# Altium PCB Shutdown_2019_v1.1.PcbDoc (part 2 of 2)
Units mil, origin at the board's own origin, x right, y up, seen from the top; angles counter-clockwise.
Board outline 4900 x 3600 mil, 2 copper layers (Top, Bottom); 222 components, 139 nets, 683 pads, 335 vias.
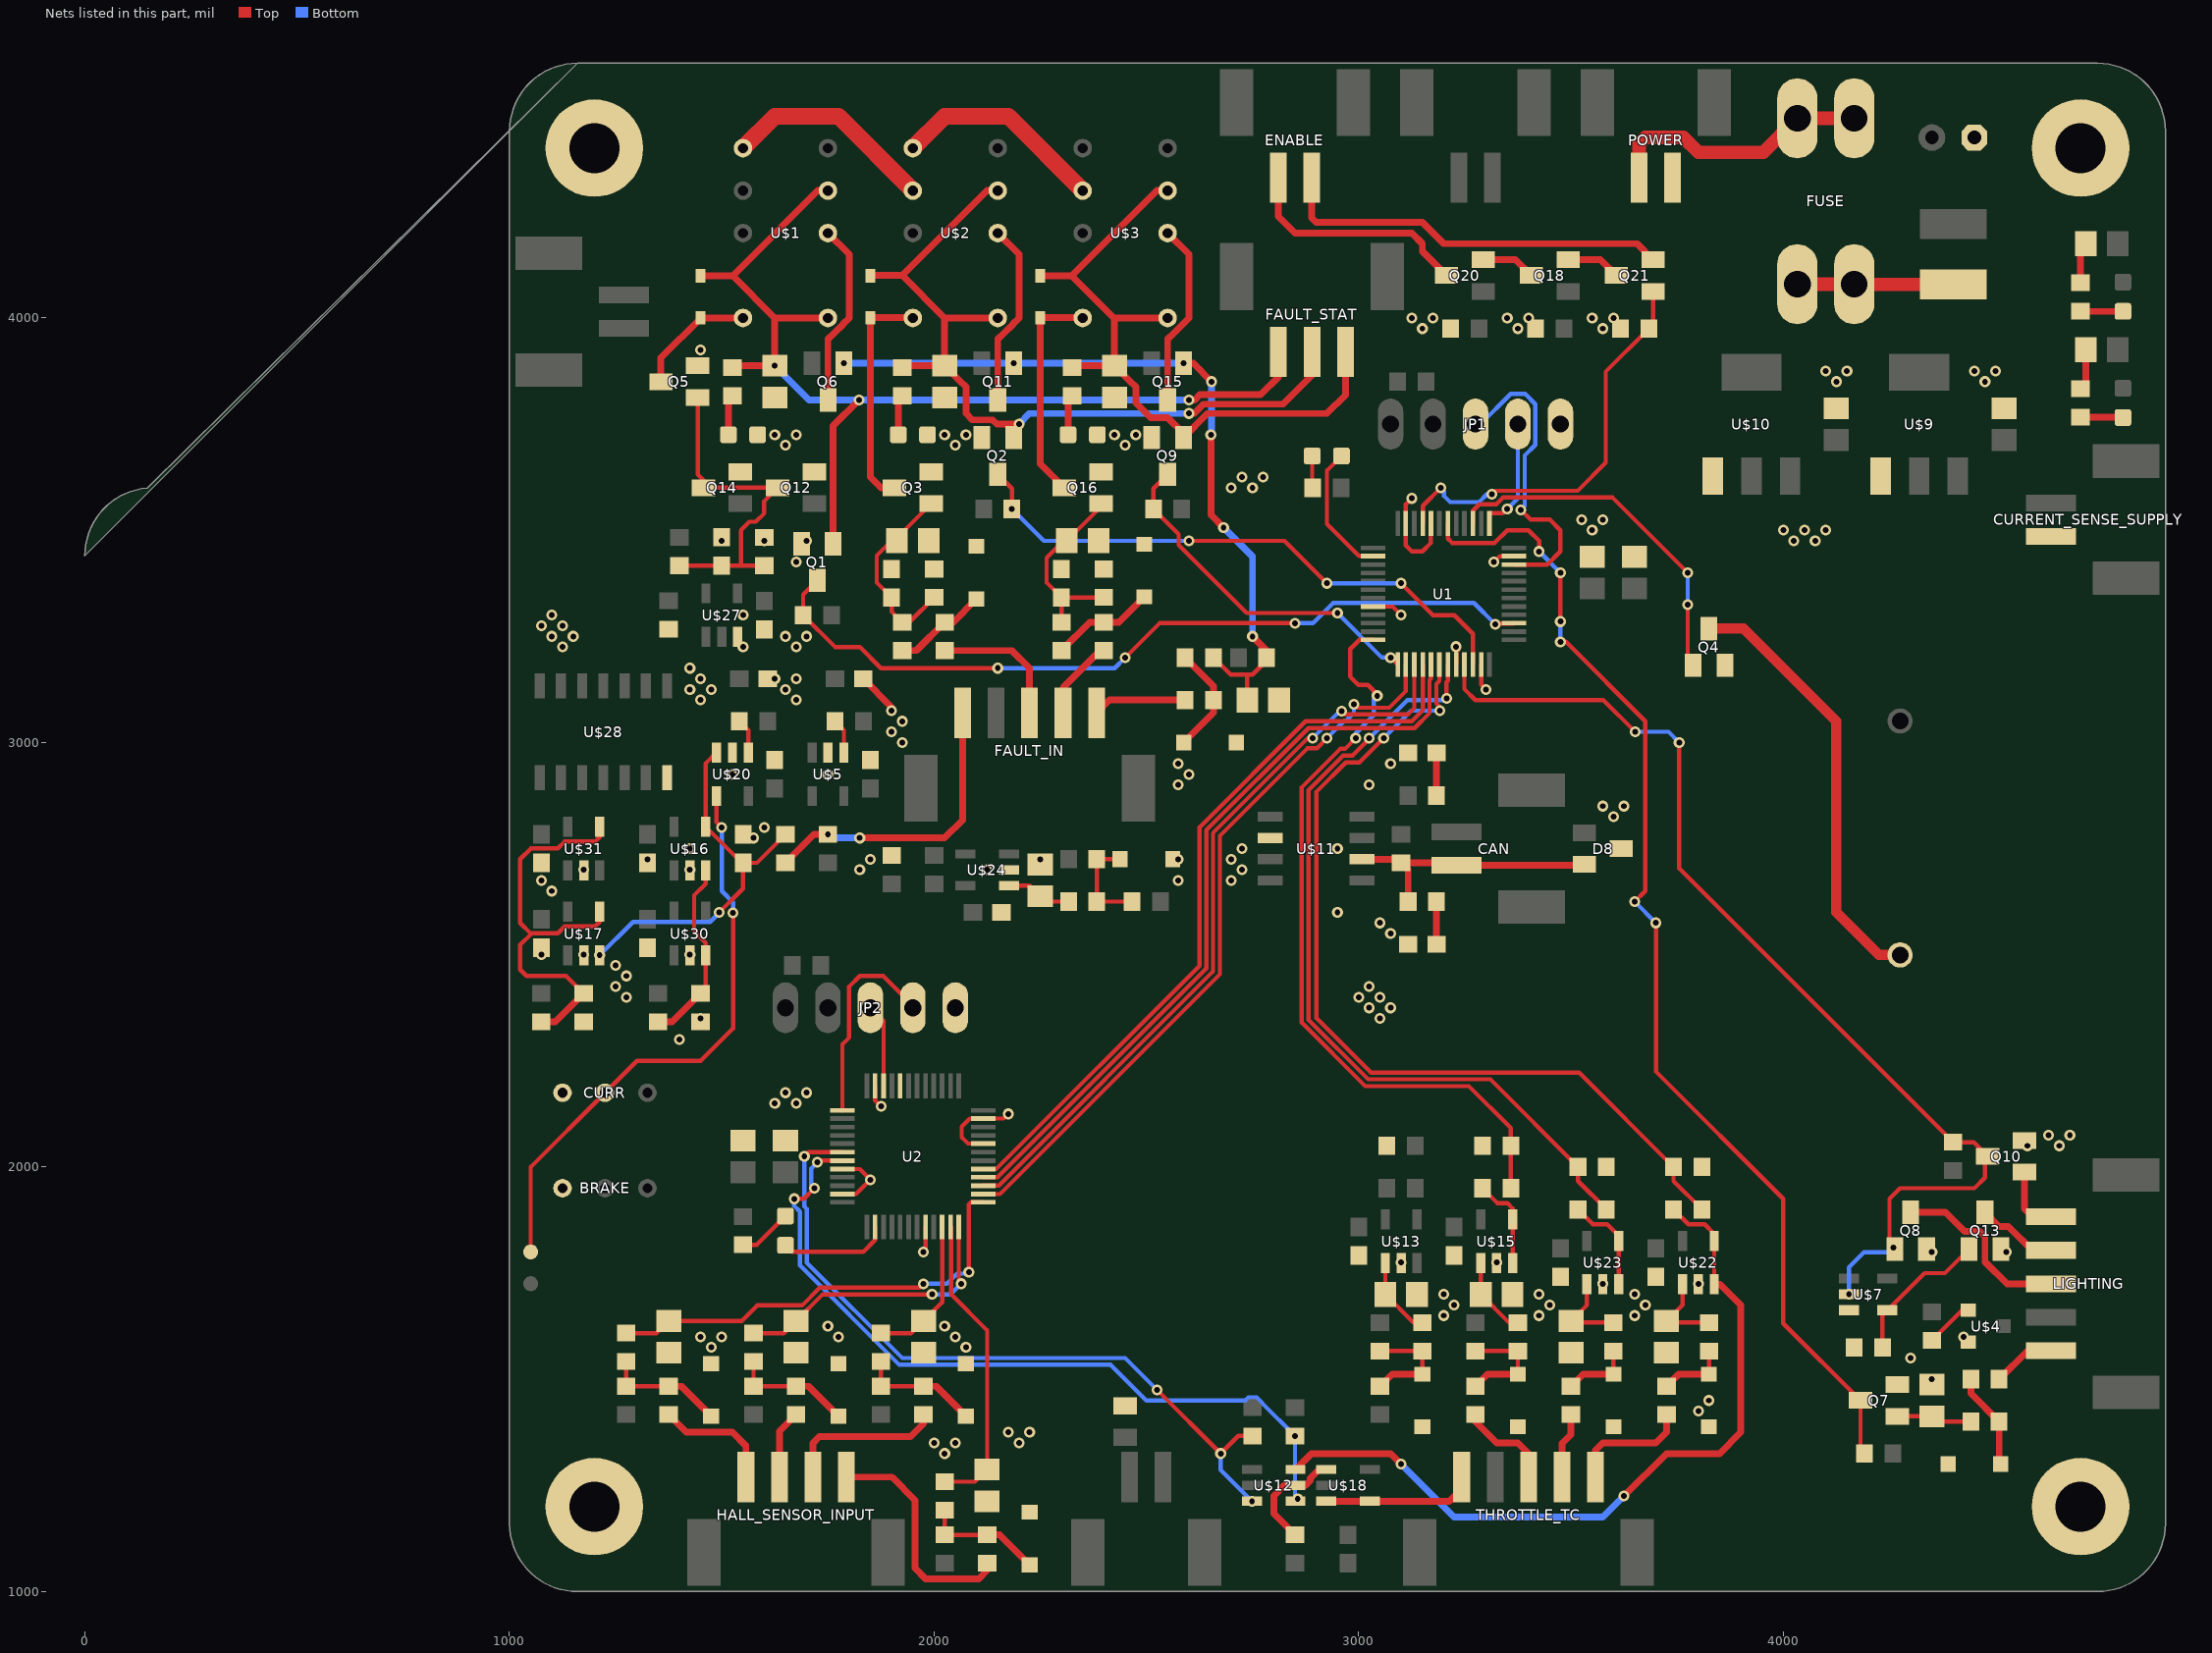
[diagram p2: the nets of this part, all layers, seen from the top]

## Via types
v1: diameter 25.78/25.78 (per signal layer), hole 13.78, Top to Bottom, 335 vias

## Nets (pads, with @x,y where several pads share a name; then routed paths per layer and width w, separated by ;. In a path a pad name is that pad's centre, name@x,y a point inside that pad or via, vN(x,y) a via of type N, cw(c..) or ccw(c..) an arc to the next point about the centre after c; other vN are vias at no path point) (continued)
CANL: CAN.2 D8.2 R19.2 R24.1 U$11.6 | length 628.6
  Top w16: U$11.6@3008.27,2725 3091.54,2725 R24.1@3100,2716.54 ; R19.2@3116.54,2625 3116.54,2700 R24.1@3100,2716.54 ; D8.2@3531.69,2712.6 3529.72,2710.63 CAN.2@3230.31,2710.63 3224.41,2716.54 R24.1@3100,2716.54
CURR_TH: CURR.W TTH1.TP U$20.4 | length 1375.2
  Top w10: TTH1.TP@1050,1800 1050,2000 CURR.W@1225,2175 1300,2250 1450,2250 1526.48,2326.48 v1(1526.48,2598.52) ; U$20.4@1487.6,2873.82 1487.6,2812.4 v1(1500,2800)
  Bottom w10: v1(1500,2800) 1500,2650 1526.48,2623.52 v1(1526.48,2598.52)
CURRENT_SENSE: FAULT_IN.5 R8.1 R44.2 | length 718.5
  Top w16: R44.2@1650,2716.54 1716.93,2783.46 v1(1750,2783.46) ; v1(1825,2775) 2025,2775 2067.52,2817.52 FAULT_IN.5@2067.52,3069.69
  Bottom w16: v1(1750,2783.46) 1758.46,2775 v1(1825,2775)
CURRENT_SENSE_F: C25.1 R44.1 U$16.4 U$17.3 U$20.3 | length 899.6
  Top w10: U$20.3@1487.6,2976.18 1462.4,2950.98 U$16.4@1462.4,2801.18 1547.05,2716.54 C25.1@1550,2716.54 ; v1(1494.18,2600) 1550,2655.82 C25.1@1550,2716.54 ; R44.1@1650,2783.46 1583.07,2716.54 C25.1@1550,2716.54
  Bottom w10: v1(1212.4,2498.82) 1290.87,2577.29 1472.3,2577.29 1486.29,2591.29 1486.29,2592.11 v1(1494.18,2600)
DEBUG: D10.C U1.2 | length 314.8
  Top w10: D10.C@2959.53,3675 2925,3640.47 2925,3515 3001,3439 U1.2@3034,3439
DEBUG_TC: D13.C U2.2 | length 260
  Top w10: D13.C@1650,1815.47 1665.47,1800 1833.06,1800 1861,1827.94 U2.2@1861,1859
ENABLE_IN: ENABLE.2 Q21.2 | length 939.3
  Top w16: ENABLE.2@2889.37,4330.31 2889.37,4235.63 2900,4225 3150,4225 3200,4175 3655.71,4175 Q21.2@3693.31,4137.4
ENABLE_OUT: ENABLE.1 Q20.3 | length 555.5
  Top w16: ENABLE.1@2810.63,4330.31 2810.63,4239.37 2850,4200 3125,4200 3150,4175 3150,4156.69 Q20.3@3206.69,4100
FAULT_BMS: FAULT_IN.3 R37.1 | length 322.5
  Top w16: R37.1@2025,3216.54 2183.46,3216.54 2225,3175 FAULT_IN.3@2225,3069.69
FAULT_BMS_F: C6.1 C23.1 Q3.1 R17.2 R38.2 | length 463.6
  Top w10: Q3.1@1993.31,3562.6 1912.6,3481.89 C23.1@1912.6,3475 1900,3475 1865,3440 1865,3376.54 C6.1@1900,3341.54 1900,3308.46 R38.2@1925,3283.46 1941.93,3283.46 R17.2@2000,3341.54
FAULT_BMS_STAT: C8.1 D9.C FAULT_STAT.2 Q2.1 R22.1 U$2.$P1 U$2.$P4 | length 1970.5
  Top w16: D9.C@1850,4099.21 1850.79,4100 1925,4100 ; R22.1@1925,3883.46 1928.94,3887.4 C8.1@2025,3887.4 ; U$2.$P1@2150,4000 2025,4000 ; U$2.$P4@2150,4300 2125,4300 1925,4100 ; Q2.1@2187.4,3718.31 2187.4,3737.4 v1(2200,3750) 2147.95,3750 2138.08,3759.87 2090.13,3759.87 2075,3775 2075,3837.52 2060.33,3852.19 2060.21,3852.19 C8.1@2025,3887.4 ; v1(2600,3775) 2612.98,3775 2634.98,3797 2822,3797 2900,3875 2890,3885 FAULT_STAT.2@2890,3920.31 ; 1925,4100 2025,4000 ; C8.1@2025,3887.4 2025,4000
  Bottom w16: v1(2200,3750) 2225,3775 v1(2600,3775)
FAULT_BMS_STATUS_3_3: Q2.3 R13.1 U1.22 | length 1374.9
  Top w10: Q2.3@2150,3631.69 2183.46,3598.23 v1(2183.46,3550) ; v1(2600,3475) 2825,3475 v1(2925,3375) ; v1(3100,3375) 3175,3300 3225,3300 3269,3256 U1.22@3269,3184
  Bottom w10: v1(2183.46,3550) 2254.23,3479.23 2258.46,3475 v1(2600,3475) ; v1(2925,3375) v1(3100,3375)
FAULT_BSPD: C7.1 Q5.1 Q12.3 Q14.3 R5.1 R16.2 | length 828.9
  Top w10: R5.1@1400,3416.54 C7.1@1500,3416.54 1545,3416.54 ; Q5.1@1443.31,3812.6 1443.31,3631.69 Q14.3@1475,3600 ; Q14.3@1456.69,3600 Q14.3@1475,3600 ; R16.2@1600,3416.54 1545,3416.54 ; Q14.3@1475,3600 Q12.3@1631.69,3600 1600,3568.31 1600,3540 1580,3520 1565,3520 1545,3500 1545,3416.54
FAULT_BSPD_STAT: C2.1 D2.C FAULT_STAT.1 Q1.1 R15.1 U$1.$P1 U$1.$P4 | length 2527.6
  Top w16: D2.C@1450,4099.21 1525.79,4099.21 ; R15.1@1525,3883.46 1528.94,3887.4 v1(1625,3887.4) 1625,4000 ; U$1.$P1@1750,4000 1625,4000 ; U$1.$P4@1750,4300 1726.57,4300 1525.79,4099.21 ; Q1.1@1762.4,3468.31 1762.4,3746.07 v1(1823.11,3806.78) ; v1(2600,3806.78) 2613.65,3806.78 2625.87,3819 2769,3819 2811.26,3861.26 FAULT_STAT.1@2811.26,3920.31 ; 1525.79,4099.21 1625,4000
  Bottom w16: v1(1625,3887.4) 1705.62,3806.78 v1(1823.11,3806.78) v1(2600,3806.78)
FAULT_BSPD_STATUS_3_3: Q1.3 R12.1 U1.27 | length 1907.7
  Top w10: Q1.3@1725,3381.69 1691.54,3348.23 R12.1@1691.54,3300 1766.54,3225 1825,3225 1875,3175 v1(2150,3175) ; v1(2450,3200) 2531,3281 v1(2850,3281) ; v1(3321.89,3278.11) 3323.79,3280 3365,3280 U1.27@3366,3281
  Bottom w10: v1(2150,3175) 2425,3175 v1(2450,3200) ; v1(2850,3281) 2892.32,3281 2940.1,3328.78 3271.22,3328.78 v1(3321.89,3278.11)
FAULT_IMD: FAULT_IN.2 R41.1 | length 191.7
  Top w16: FAULT_IN.2@2303.74,3069.69 2303.74,3128.74 2391.54,3216.54 R41.1@2400,3216.54
FAULT_IMD_F: C5.1 C26.1 Q16.1 R18.2 R42.2 | length 451.2
  Top w10: R42.2@2300,3283.46 C5.1@2300,3341.54 ; Q16.1@2393.31,3562.6 2393.31,3555.71 C26.1@2312.6,3475 2305,3475 2265,3435 2265,3376.54 C5.1@2300,3341.54 ; R18.2@2400,3341.54 C5.1@2300,3341.54
FAULT_IMD_STAT: C9.1 D15.C FAULT_STAT.3 Q9.1 R21.1 U$3.$P1 U$3.$P4 | length 1649.4
  Top w16: D15.C@2250,4099.21 2324.21,4099.21 ; R21.1@2325,3883.46 2328.94,3887.4 C9.1@2425,3887.4 ; U$3.$P1@2550,4000 2423.43,4000 ; U$3.$P4@2550,4300 2525,4300 2324.21,4099.21 ; FAULT_STAT.3@2968.74,3920.31 2968.74,3818.74 2925,3775 2644.09,3775 Q9.1@2587.4,3718.31 2587.4,3727.73 2550,3765.13 2509.87,3765.13 2475,3800 2475,3837.52 2460.33,3852.19 2460.21,3852.19 C9.1@2425,3887.4 ; 2324.21,4099.21 2423.43,4000 ; 2423.43,4000 2425,3998.43 C9.1@2425,3887.4
FAULT_IMD_STATUS_3_3: Q9.3 R14.1 U1.13 | length 837.4
  Top w10: Q9.3@2550,3631.69 2516.54,3598.23 R14.1@2516.54,3550 2576.11,3490.43 2576.11,3465.1 2736.32,3304.89 v1(2950,3304.89) ; v1(3075,3200) 3076,3200 U1.13@3092,3184
  Bottom w10: v1(2950,3304.89) 3054.89,3200 v1(3075,3200)
FAULT_RESET: FAULT_IN.1 R33.1 | length 221.6
  Top w16: FAULT_IN.1@2382.48,3069.69 2412.8,3100 R33.1@2591.54,3100
FAULT_RESET_F: C22.1 Q6.1 Q11.1 Q15.1 R25.1 R34.2 | length 1812.6
  Top w10: R34.2@2658.46,3200 2698.46,3160 2735,3160 ; C22.1@2737.6,3100 2737.6,3157.4 2735,3160 ; R25.1@2783.46,3200 2783.46,3193.46 2750,3160 2735,3160
  Top w16: v1(2587.4,3893.31) 2610.47,3893.31 v1(2653.78,3850) ; v1(2651.89,3725) 2651.89,3536.14 v1(2681.78,3506.25) ; v1(2750,3250) 2783.46,3216.54 R25.1@2783.46,3200
  Bottom w16: v1(1787.4,3893.31) v1(2187.4,3893.31) v1(2587.4,3893.31) ; v1(2651.89,3725) 2653.78,3726.89 v1(2653.78,3850) ; v1(2681.78,3506.25) 2750,3438.03 v1(2750,3250)
GND: BRAKE.B C1.2 C2.2 C3.2 C4.2 C5.2 C6.2 C7.2 C8.2 C9.2 C10.- C11.2 C12.2 C13.2 C14.2 C15.2 C16.2 C17.2 C18.2 C19.2 C20.2 C22.2 C23.2 C24.2 C25.2 C26.2 C27.2 C28.2 C29.2 C30.2 C31.2 C32.2 C33.2 C34.2 C35.2 C36.2 C37.2 C38.2 C39.2 C40.2 C41.2 C42.2 C43.2 C44.2 C45.2 C46.2 CURR.B CURRENT_SENSE_SUPPLY.2 D1.C D4.C D7.C D8.3 H1.B3,0 H2.B3,0 H3.B3,0 H4.B3,0 JP1.5 JP2.5 POWER.2 Q1.2 Q2.2 Q3.2 Q4.2 Q5.2 Q7.2 Q8.2 Q9.2 Q10.2 Q12.2 Q13.2 Q14.2 Q16.2 R2.1 R3.1 R4.1 R16.1 R17.1 R18.1 R30.1 R31.1 R32.1 R40.1 R43.1 R71.1 R72.1 R73.1 R76.1 R81.1 R83.1 U1.8 U1.20 U1.23 U1.35 U1.44 U1.47 U2.8 U2.20 U2.23 U2.35 U2.44 U2.47 U$4.2 U$5.2 U$7.3 U$8.2 U$9.1 U$10.1 U$11.2 U$13.2 U$14.A U$15.2 U$16.2 U$17.2 U$19.A U$20.2 U$21.A U$22.2 U$23.2 U$24.2 U$25.A U$26.A U$27.3 U$28.P7 U$29.A U$30.2 U$31.2 U$32.A U$33.A U$34.A U$36.A U$37.A U$38.A U$39.A | length 1241.2
  Top w10: U2.47@1784,1936 1816,1936 v1(1850,1970) 1825,1995 U2.44@1784,1995 ; U2.35@1861,2191 1861,2157.11 v1(1875,2143.11) ; v1(1975,1800) 1980,1805 U2.8@1980,1859 ; U2.20@2116,2055 2080,2055 2065,2070 2065,2095 2084,2114 U2.23@2116,2114 2164,2114 v1(2175,2125) ; U1.8@3034,3320 3080,3320 v1(3100,3300) ; v1(3125,3575) 3111,3561 U1.47@3111,3516 3111,3464 3125,3450 3150,3450 3170,3470 U1.44@3170,3516 ; v1(3229.5,3225.71) 3230,3225.21 U1.20@3230,3184 ; U1.23@3289,3184 3289,3136 v1(3300,3125) ; v1(3318.11,3425) 3331.11,3438 3333.25,3438 3334.25,3439 U1.35@3366,3439
  Top w16: C3.2@1833.46,3150 1900,3083.46 v1(1900,3075) ; R2.1@4700,3833.46 4712.6,3846.06 C11.2@4712.6,3925 ; R4.1@4700,4083.46 4700,4162.4 C14.2@4712.6,4175
  other v1: 2025,1325 2000,1350 2050,1350 2200,1350 2175,1375 2225,1375 3800,1425 3825,1450 4350,1500 4300,1550 1475,1575 2075,1575 1450,1600 1500,1600 1775,1600 2050,1600 4425,1600 1750,1625 2025,1625 3200,1650 3425,1650 3650,1650 3225,1675 3450,1675 3675,1675 3200,1700 3425,1700 3650,1700 3575,1725 3800,1725 3100,1775 3325,1775 4350,1800 4525,1800 4575,2050 4650,2050 4625,2075 4675,2075 1625,2150 1675,2150 1650,2175 1700,2175 1400,2300 1450,2350 3050,2350 3025,2375 3075,2375 1275,2400 3000,2400 3050,2400 1250,2425 3025,2425 1275,2450 1250,2475 1075,2500 1175,2500 1425,2500 3075,2550 3050,2575 2950,2600 1100,2650 1075,2675 2575,2675 2700,2675 1175,2700 1425,2700 1825,2700 2125,2700 2725,2700 1325,2725 1850,2725 2250,2725 2575,2725 2700,2725 1425,2750 2725,2750 2950,2750 1575,2775 1600,2800 3600,2825 3575,2850 3625,2850 2575,2900 3025,2900 1525,2925 1750,2925 2600,2925 2575,2950 3075,2950 1925,3000 1900,3025 1925,3050 1450,3100 1675,3100 1425,3125 1475,3125 1650,3125 1450,3150 1625,3150 1675,3150 1425,3175 1125,3225 1550,3225 1675,3225 1100,3250 1150,3250 1650,3250 1700,3250 1075,3275 1125,3275 1100,3300 1550,3300 1675,3425 1500,3475 1600,3475 1700,3475 4025,3475 4075,3475 3550,3500 4000,3500 4050,3500 4100,3500 3525,3525 3575,3525 2700,3600 2750,3600 2725,3625 2775,3625 1650,3700 2050,3700 2450,3700 1625,3725 1675,3725 2025,3725 2075,3725 2425,3725 2475,3725 4125,3850 4475,3850 4100,3875 4150,3875 4450,3875 4500,3875 1450,3925 3150,3975 3375,3975 3575,3975 3125,4000 3175,4000 3350,4000 3400,4000 3550,4000 3600,4000
HALL_FL: HALL_SENSOR_INPUT.1 R57.1 | length 549.7
  Top w16: HALL_SENSOR_INPUT.1@1793.11,1269.69 1900.32,1269.69 1955,1215 1955,1055 1980,1030 2105,1030 2125,1050 R57.1@2125,1066.54
HALL_FL_F: C33.1 R58.2 U2.11 | length 719.2
  Top w10: R58.2@2025,1258.46 2096.06,1258.46 C33.1@2125,1287.4 2125,1615 2040,1700 2040,1858 U2.11@2039,1859
HALL_FR: HALL_SENSOR_INPUT.2 R59.1 | length 380.8
  Top w16: HALL_SENSOR_INPUT.2@1714.37,1269.69 1714.37,1349.37 1730,1365 1945,1365 1975,1395 R59.1@1975,1416.54
HALL_FR_F: C34.1 R60.2 U2.10 | length 351.8
  Top w10: R60.2@1875,1608.46 1946.06,1608.46 C34.1@1975,1637.4 2019,1681.4 U2.10@2019,1859
HALL_RL: HALL_SENSOR_INPUT.3 R61.1 | length 163.2
  Top w16: HALL_SENSOR_INPUT.3@1635.63,1269.69 1635.63,1377.17 R61.1@1675,1416.54
HALL_RL_F: C35.1 R62.2 U2.12 | length 673.6
  Top w10: R62.2@1575,1608.46 1646.06,1608.46 C35.1@1675,1637.4 1737.6,1700 v1(1995.11,1700) ; U2.12@2058,1859 2058,1730.89 v1(2063.89,1725)
  Bottom w10: v1(1995.11,1700) 2038.89,1700 v1(2063.89,1725)
HALL_RR: HALL_SENSOR_INPUT.4 R63.1 | length 285.7
  Top w16: R63.1@1375,1416.54 1416.54,1375 1525,1375 1556.89,1343.11 HALL_SENSOR_INPUT.4@1556.89,1269.69
HALL_RR_F: C36.1 R64.2 U2.13 | length 1062.5
  Top w10: R64.2@1275,1608.46 1346.06,1608.46 C36.1@1375,1637.4 1547.04,1637.4 1583.63,1673.99 1688.96,1673.99 1730.97,1716 1966.17,1716 v1(1975.08,1724.92) ; v1(2081.89,1751.94) 2081.89,1911.89 2087,1917 U2.13@2116,1917
  Bottom w10: v1(1975.08,1724.92) 2030.02,1724.92 2053.99,1748.89 2078.84,1748.89 v1(2081.89,1751.94)
HV_CONNECTED_3_3: Q8.1 Q10.3 R23.1 U1.21 U$7.2 | length 2529.9
  Top w10: U1.21@3249,3184 3249,3126 3275,3100 3576.11,3100 v1(3651.11,3025) ; v1(3754.78,3000) 3754.78,2703.69 R23.1@4400,2058.46 4448.23,2058.46 Q10.3@4481.69,2025 4475,2018.31 4475,1975 4450,1950 4275,1950 4250,1925 4250,1819.29 v1(4259.65,1809.65) Q8.1@4262.6,1806.69
  Bottom w10: v1(3651.11,3025) 3729.78,3025 v1(3754.78,3000) ; v1(4154.72,1700) 4154.72,1763.51 4190.1,1798.89 4248.89,1798.89 v1(4259.65,1809.65)
N$1: D9.A Q3.3 U$2.$P12 | length 543.2
  Top w16: Q3.3@1906.69,3600 1875,3600 1850,3625 D9.A@1850,4000.79 1949.21,4000.79 U$2.$P12@1950,4000
N$2: R55.2 R56.1 U$21.C | length 229.2
  Top w16: R55.2@4441.54,1500 4441.54,1466.93 R56.1@4508.46,1400 4508.46,1303.54 U$21.C@4512.01,1300
N$3: R9.2 U$4.1 | length 115
  Top w10: R9.2@4350,1591.54 4420.87,1662.4 U$4.1@4435.63,1662.4
N$4: Q4.3 U$6.NEG | length 1032.1
  Top w24: Q4.3@3825,3268.31 3906.69,3268.31 4125,3050 4125,2600 4225.59,2499.41 U$6.NEG@4275,2499.41
N$5: R10.2 R45.1 R77.1 U$14.C | length 266.4
  Top w10: R77.1@3050,1566.54 R45.1@3150,1566.54 U$14.C@3150,1512.01
  Top w16: R10.2@3050,1483.46 3078.54,1512.01 U$14.C@3150,1512.01
N$6: FUSE.P$2 FUSE.P$3 L4.P$1 | length 367.2
  Top w32: FUSE.P$3@4033.07,4079.72 FUSE.P$2@4166.93,4079.72 4167.52,4079.13 L4.P$1@4400,4079.13
N$7: C40.1 R45.2 U$13.1 | length 188.8
  Top w10: U$13.1@3062.6,1773.82 C40.1@3062.6,1700 3129.13,1633.46 R45.2@3150,1633.46
N$8: D7.A R15.2 | length 95.5
  Top w16: D7.A@1515.47,3725 1515.47,3807.01 R15.2@1525,3816.54
N$9: Q13.1 R3.2 U$7.4 | length 344.5
  Top w10: R3.2@4233.46,1575 4233.46,1650.79 U$7.4@4245.28,1662.6 4332.68,1750 4380.91,1750 Q13.1@4437.6,1806.69
N$10: D12.C R4.2 | length 100.4
  Top w16: R4.2@4700,4016.54 4701.06,4015.47 D12.C@4800,4015.47
N$11: D11.C R2.2 | length 100.4
  Top w16: R2.2@4700,3766.54 4798.94,3766.54 D11.C@4800,3765.47
N$12: R7.2 U$12.5 U$18.1 | length 265.1
  Top w16: R7.2@2850,1133.46 2800,1183.46 2800,1225 2825,1250 U$12.5@2851.18,1250 2875,1250 2886.2,1261.2 2886.2,1266.63 2906.97,1287.4 U$18.1@2923.82,1287.4
N$13: R36.2 U$20.1 | length 82.5
  Top w10: R36.2@1541.54,3050 1562.4,3029.13 U$20.1@1562.4,2976.18
N$14: C17.1 R19.1 | length 100
  Top w16: C17.1@3183.46,2525 R19.1@3183.46,2625
N$17: C18.1 R20.1 | length 100
  Top w16: R20.1@3183.46,2875 C18.1@3183.46,2975
N$18: R1.2 U$5.1 | length 82.5
  Top w10: R1.2@1766.54,3050 1787.4,3029.13 U$5.1@1787.4,2976.18
N$19: D10.A R27.2 | length 75.4
  Top w10: D10.A@2890.47,3675 2890.47,3601.06 R27.2@2891.54,3600
N$20: R49.2 R50.1 U$32.C | length 166.4
  Top w10: U$32.C@3825,1512.01 R50.1@3825,1566.54
  Top w16: R49.2@3725,1483.46 3753.54,1512.01 U$32.C@3825,1512.01
N$21: D13.A R29.2 | length 128.2
  Top w10: R29.2@1550,1816.54 1582.01,1816.54 D13.A@1650,1884.53
N$22: R78.2 R79.1 R82.1 U$19.C | length 266.4
  Top w10: R82.1@3275,1566.54 R79.1@3375,1566.54 U$19.C@3375,1512.01
  Top w16: R78.2@3275,1483.46 3303.54,1512.01 U$19.C@3375,1512.01
N$23: C41.1 R79.2 U$15.1 | length 188.8
  Top w10: U$15.1@3287.6,1773.82 C41.1@3287.6,1700 3354.13,1633.46 R79.2@3375,1633.46
N$24: Q18.3 Q20.2 | length 128.9
  Top w16: Q20.2@3293.31,4137.4 3369.29,4137.4 Q18.3@3406.69,4100
N$25: Q18.2 Q21.3 | length 128.9
  Top w16: Q18.2@3493.31,4137.4 3569.29,4137.4 Q21.3@3606.69,4100
N$27: U$1.$P8 U$2.$P9 | length 503.6
  Top w40: U$1.$P8@1550,4400 1625,4475 1775,4475 U$2.$P9@1950,4300
N$28: Q6.3 U$1.$P3 | length 435.1
  Top w16: Q6.3@1750,3806.69 1750,3950 1764.19,3964.19 1764.83,3964.19 1785.81,3985.17 1785.81,3985.81 1800,4000 1800,4150 U$1.$P3@1750,4200
N$29: R33.2 R34.1 U$25.C | length 256.9
  Top w16: U$25.C@2587.99,3000 2658.46,3070.47 R33.2@2658.46,3100 2658.46,3133.07 R34.1@2591.54,3200
N$31: U$2.$P8 U$3.$P9 | length 503.6
  Top w40: U$2.$P8@1950,4400 2025,4475 2175,4475 U$3.$P9@2350,4300
N$32: D2.A Q5.3 U$1.$P12 | length 289.3
  Top w16: Q5.3@1356.69,3850 1356.69,3905.91 D2.A@1450.79,4000 ; D2.A@1450,4000.79 D2.A@1450.79,4000 ; U$1.$P12@1550,4000 D2.A@1450.79,4000
N$34: D4.A R22.2 | length 95.5
  Top w16: D4.A@1915.47,3725 1915.47,3807.01 R22.2@1925,3816.54
N$35: Q11.3 U$2.$P3 | length 435.1
  Top w16: Q11.3@2150,3806.69 2150,3950 2164.19,3964.19 2164.83,3964.19 2185.81,3985.17 2185.81,3985.81 2200,4000 2200,4150 U$2.$P3@2150,4200
N$37: R37.2 R38.1 U$26.C | length 225.3
  Top w16: R38.1@1925,3216.54 1958.07,3216.54 R37.2@2025,3283.46 2045.47,3283.46 U$26.C@2100,3337.99
N$38: C29.1 R50.2 U$22.1 | length 203.6
  Top w10: U$22.1@3762.6,1723.82 3762.6,1675 C29.1@3725,1637.4 3728.94,1633.46 R50.2@3825,1633.46
N$42: D1.A R21.2 | length 95.5
  Top w16: D1.A@2315.47,3725 2315.47,3807.01 R21.2@2325,3816.54
N$43: Q15.3 U$3.$P3 | length 435.1
  Top w16: Q15.3@2550,3806.69 2550,3950 2564.19,3964.19 2564.83,3964.19 2600,3999.36 2600,4150 U$3.$P3@2550,4200
N$44: D15.A Q16.3 U$3.$P12 | length 524.6
  Top w16: Q16.3@2306.69,3600 2250,3656.69 D15.A@2250,4000.79 2349.21,4000.79 U$3.$P12@2350,4000
N$49: R41.2 R42.1 U$29.C | length 247.4
  Top w16: R42.1@2300,3216.54 2366.93,3283.46 R41.2@2400,3283.46 2435.47,3283.46 U$29.C@2495,3342.99
N$52: R51.2 R52.1 U$33.C | length 166.4
  Top w10: U$33.C@3600,1512.01 R52.1@3600,1566.54
  Top w16: R51.2@3500,1483.46 3528.54,1512.01 U$33.C@3600,1512.01
N$53: C30.1 R52.2 U$23.1 | length 203.6
  Top w10: U$23.1@3537.6,1723.82 3537.6,1675 C30.1@3500,1637.4 3503.94,1633.46 R52.2@3600,1633.46
N$59: R35.1 R53.2 R54.1 U$34.C | length 237.6
  Top w10: U$34.C@2437.99,2725 R35.1@2383.46,2725 R54.1@2383.46,2625 R53.2@2466.54,2625
N$60: C31.1 R54.2 U$24.1 | length 155.9
  Top w10: U$24.1@2176.18,2662.6 2225,2662.6 C31.1@2250,2637.6 2262.6,2625 R54.2@2316.54,2625
N$65: R57.2 R58.1 R65.1 U$36.C | length 287.3
  Top w10: R58.1@2025,1191.54 R65.1@2025,1133.46 R57.2@2125,1133.46
  Top w16: R57.2@2125,1133.46 2154.53,1133.46 U$36.C@2225,1062.99
N$68: R59.2 R60.1 R66.1 U$37.C | length 287.3
  Top w10: R60.1@1875,1541.54 R66.1@1875,1483.46 R59.2@1975,1483.46
  Top w16: R59.2@1975,1483.46 2004.53,1483.46 U$37.C@2075,1412.99
N$71: R61.2 R62.1 R67.1 U$38.C | length 287.3
  Top w10: R62.1@1575,1541.54 R67.1@1575,1483.46 R61.2@1675,1483.46
  Top w16: R61.2@1675,1483.46 1704.53,1483.46 U$38.C@1775,1412.99
N$74: R63.2 R64.1 R68.1 U$39.C | length 287.3
  Top w10: R64.1@1275,1541.54 R68.1@1275,1483.46 R63.2@1375,1483.46
  Top w16: R63.2@1375,1483.46 1404.53,1483.46 U$39.C@1475,1412.99
OC_TH: R11.1 R43.2 U$17.4 U$31.4 | length 1012.5
  Top w10: R43.2@1175,2408.46 1133.46,2450 1040,2450 1025,2465 1025,2523.43 1050.76,2549.19 ; U$17.4@1212.4,2601.18 1212.4,2577.4 1201.56,2566.56 1129.85,2566.56 1114.1,2550.81 1052.38,2550.81 1050.76,2549.19 ; U$31.4@1212.4,2801.18 1212.4,2777.4 1201.56,2766.56 1129.85,2766.56 1114.1,2750.81 1050.81,2750.81 1025,2725 1025,2574.95 1050.76,2549.19
  Top w16: R11.1@1075,2341.54 1108.07,2341.54 R43.2@1175,2408.46
PA11: U2.32
PRECHARGE_COMP_F: C32.1 Q7.1 R56.2 | length 178.4
  Top w10: Q7.1@4268.31,1412.6 C32.1@4350,1412.6 4362.6,1400 R56.2@4441.54,1400
PRECHARGE_COMPLETE: LIGHTING.5 R55.1 | length 149.8
  Top w16: R55.1@4508.46,1500 4575.98,1567.52 LIGHTING.5@4630.31,1567.52
PRECHARGE_COMPLETE_3_3: Q7.3 R74.1 U1.42 | length 2773.7
  Top w10: U1.42@3210,3516 3210,3480 3220,3470 3320,3470 3350,3500 3400,3500 3425,3475 v1(3425,3450) ; v1(3475,3237.11) 3487.89,3237.11 3675,3050 3675,2650 v1(3650,2625) ; v1(3475,3284.89) v1(3475,3400) ; v1(3700,2575) 3700,2225 4000,1925 4000,1631.69 Q7.3@4181.69,1450 4181.69,1334.84 R74.1@4191.54,1325
  Bottom w10: v1(3425,3450) v1(3475,3400) ; v1(3475,3237.11) v1(3475,3284.89) ; v1(3650,2625) v1(3700,2575)
PWR: FUSE.P$1 FUSE.P$4 POWER.1 | length 640.3
  Top w32: POWER.1@3660.63,4330.31 3660.63,4410.63 3675,4425 3765,4425 3800,4390 3952.8,4390 FUSE.P$4@4033.07,4470.28 FUSE.P$1@4166.93,4470.28
RTD_EN: Q21.1 R32.2 U1.45 | length 999.2
  Top w10: U1.45@3151,3516 3151,3557.67 v1(3193.33,3600) ; v1(3313.94,3585.11) 3321.83,3593 3515.63,3593 3582,3659.37 3582,3873.54 R32.2@3683.46,3975 3693.31,3984.84 Q21.1@3693.31,4062.6
  Bottom w10: v1(3193.33,3600) 3201.22,3592.11 3201.22,3580.1 3215.21,3566.11 3283.79,3566.11 3302.79,3585.11 v1(3313.94,3585.11)
RTDS_EN: Q4.1 U1.39 | length 845.7
  Top w10: U1.39@3269,3516 3269,3546.06 3284.16,3561.22 3323.84,3561.22 3339.62,3577 3598,3577 v1(3775,3400) ; v1(3775,3325) 3775,3194.29 Q4.1@3787.6,3181.69
  Bottom w10: v1(3775,3325) v1(3775,3400)
SC_TH: R39.1 R40.2 U$16.3 U$30.3 | length 445.9
  Top w10: R40.2@1450,2408.46 1462.4,2420.87 U$30.3@1462.4,2498.82 1462.4,2527.6 1435,2555 1435,2640 1462.4,2667.4 U$16.3@1462.4,2698.82
  Top w16: R39.1@1350,2341.54 1383.07,2341.54 R40.2@1450,2408.46
SCL_TC: R48.2 U2.42 U$12.3 | length 1742.6
  Top w10: v1(1694.43,2025) 1704.43,2035 U2.42@1784,2035 ; v1(2525,1475) v1(2675,1325) 2716.54,1366.54 R48.2@2750,1366.54
  Bottom w10: v1(1694.43,2025) 1694.43,1907.2 1700,1901.63 1700,1775 1925,1550 2450,1550 v1(2525,1475) ; v1(2675,1325) 2675,1286.42 v1(2748.82,1212.6)
SDA_TC: R47.2 U2.43 U$12.4 | length 1848.8
  Top w10: v1(1670.54,1925) 1693.32,1925 v1(1718.32,1950) ; v1(1725.48,2011.11) 1729.37,2015 U2.43@1784,2015 ; U$12.4@2851.18,1212.6 v1(2856.42,1217.83)
  Bottom w10: v1(1670.54,1925) 1670.54,1908.46 1684,1895 1684,1768.37 1918.37,1534 2416,1534 2500,1450 2732.75,1450 2740.1,1457.35 2759.9,1457.35 2773.89,1443.36 2773.89,1442.65 v1(2850,1366.54) 2850,1224.25 v1(2856.42,1217.83) ; v1(1718.32,1950) 1710.43,1957.89 1710.43,1996.06 v1(1725.48,2011.11)
SPI1_MISO: U1.16 U2.17 | length 1781.8
  Top w10: U2.17@2116,1995 2146.06,1995 2625,2473.94 2625,2800 2875,3050 3125,3050 3151,3076 U1.16@3151,3184
SPI1_MOSI: U1.17 U2.16 | length 1810.8
  Top w10: U2.16@2116,1976 2149.68,1976 2641,2467.32 2641,2793.37 2881.63,3034 3131.63,3034 3167,3069.37 3167,3147 3170,3150 U1.17@3170,3184
SPI1_NSS: U1.14 U2.14 | length 1758.6
  Top w10: U2.14@2116,1936 2154.94,1936 2673,2454.06 2673,2780.12 2879.1,2986.22 2901.42,2986.22 v1(2925.1,3009.9) ; v1(2988.94,3089.89) 2996.83,3082 3072,3082 3111,3121 U1.14@3111,3184
  Bottom w10: v1(2925.1,3009.9) 2965.2,3050 2969.9,3050 2988.94,3069.05 v1(2988.94,3089.89)
SPI1_SCK: U1.15 U2.15 | length 1781.5
  Top w10: U2.15@2116,1956 2152.31,1956 2657,2460.69 2657,2786.75 2880.37,3010.11 v1(2891.52,3010.11) ; v1(2960,3073.89) 2967.89,3066 3116,3066 3131,3081 U1.15@3131,3184
  Bottom w10: v1(2891.52,3010.11) 2955.3,3073.89 v1(2960,3073.89)
STEERING_POS: R78.1 THROTTLE_TC.3 | length 227.9
  Top w16: R78.1@3275,1416.54 3275,1400 3325,1350 3375,1350 3400,1325 THROTTLE_TC.3@3400,1269.69
STEERING_POS_F: R80.2 U$15.3 U$15.4 | length 219.3
  Top w10: R80.2@3291.54,1950 3326.54,1915 3350,1915 3362.4,1902.6 U$15.4@3362.4,1876.18 U$15.3@3362.4,1773.82
STEERING_POS_F_3_3: R80.1 R81.2 U1.12 | length 1799.7
  Top w10: v1(2992.88,3010.11) 2967.77,2985 2956.61,2985 2866,2894.39 2866,2340.09 3015.55,2190.55 3259.45,2190.55 3358.46,2091.54 R81.2@3358.46,2050 R80.1@3358.46,1950 ; U1.12@3034,3242 3002,3242 2980,3220 2980,3155 2999.22,3135.78 3021.78,3135.78 3035.78,3121.78 3035.78,3117.89 v1(3043.67,3110)
  Bottom w10: v1(2992.88,3010.11) 2992.88,3021.27 3035.78,3064.17 3035.78,3102.11 v1(3043.67,3110)
SWCLK: JP1.4 U1.37 | length 279.3
  Top w10: U1.37@3308,3516 3308,3538 3310,3540 3340,3540 v1(3350,3550)
  Bottom w10: v1(3350,3550) 3375,3575 JP1.4@3375,3750
SWCLK_TC: JP2.4 U2.37 | length 493
  Top w10: U2.37@1784,2133 1784,2289 1800,2305 1800,2425 1825,2450 1880,2450 1950,2380 JP2.4@1950,2375
SWDIO: JP1.3 U1.34 | length 728.5
  Top w10: U1.34@3366,3419 3444,3419 3475,3450 3475,3500 3450,3525 3404.77,3525 v1(3381.78,3547.99)
  Bottom w10: JP1.3@3275,3750 3287.02,3750 3358.02,3821 3391.98,3821 3416,3796.98 3416,3701 3391,3676 3391,3557.21 v1(3381.78,3547.99)
SWDIO_TC: JP2.3 U2.34 | length 196.8
  Top w10: JP2.3@1850,2375 1881,2344 U2.34@1881,2191
THROTTLE_A: R49.1 THROTTLE_TC.1 | length 289.5
  Top w16: THROTTLE_TC.1@3557.48,1269.69 3557.48,1332.48 3575,1350 3700,1350 3725,1375 R49.1@3725,1416.54
THROTTLE_A_F: R69.2 U$12.6 U$22.3 U$22.4 | length 1830.6
  Top w10: R69.2@3741.54,1900 3776.54,1865 3815,1865 3837.4,1842.6 U$22.4@3837.4,1826.18 U$22.3@3837.4,1723.82
  Top w16: U$12.6@2851.18,1287.4 2888.78,1325 3075,1325 v1(3100,1300) ; v1(3625,1225) 3725,1325 3850,1325 3900,1375 3900,1675 3851.18,1723.82 U$22.3@3837.4,1723.82
  Bottom w16: v1(3100,1300) 3225,1175 3575,1175 v1(3625,1225)
THROTTLE_A_F_3_3: R69.1 R73.2 U1.18 | length 2131.6
  Top w10: v1(3058.79,3010.11) 3001.68,2953 2969.87,2953 2900.67,2883.81 2900.67,2350.67 3028.8,2222.55 3518.99,2222.55 R73.2@3741.54,2000 3741.54,1966.93 R69.1@3808.46,1900 ; U1.18@3190,3184 3190,3145 3183,3138 3183,3092 3190.89,3084.11 v1(3190.89,3075)
  Bottom w10: v1(3058.79,3010.11) 3123.68,3075 v1(3190.89,3075)
THROTTLE_B: R51.1 THROTTLE_TC.2 | length 155.7
  Top w16: THROTTLE_TC.2@3478.74,1269.69 3478.74,1348.74 3500,1370 R51.1@3500,1416.54
THROTTLE_B_F: R46.2 U$23.3 U$23.4 | length 235.5
  Top w10: R46.2@3516.54,1900 3551.54,1865 3585,1865 3612.4,1837.6 U$23.4@3612.4,1826.18 U$23.3@3612.4,1723.82
THROTTLE_B_F_3_3: R46.1 R72.2 U1.19 | length 1943.7
  Top w10: v1(3025,3010.11) 3016.77,3001.88 3016.77,3000.21 2985.55,2969 2963.24,2969 2882,2887.76 2882,2346.72 3022.17,2206.55 3309.99,2206.55 R72.2@3516.54,2000 3516.54,1966.93 R46.1@3583.46,1900 ; v1(3206.89,3103.94) 3206.89,3141.89 3210,3145 U1.19@3210,3184
  Bottom w10: v1(3025,3010.11) 3114.89,3100 3202.95,3100 v1(3206.89,3103.94)
THROTTLE_OUT: THROTTLE_TC.5 U$18.3 U$18.4 | length 364.5
  Top w16: U$18.3@2923.82,1212.6 U$18.4@3026.18,1212.6 3212.6,1212.6 3250,1250 3242.52,1257.48 THROTTLE_TC.5@3242.52,1269.69
TSAL_EN: LIGHTING.1 Q10.1 | length 157.9
  Top w16: Q10.1@4568.31,1987.6 4568.31,1901.69 4590,1880 4627.83,1880 LIGHTING.1@4630.31,1882.48
TSAL_HV-: LIGHTING.3 Q8.3 | length 434.8
  Top w16: Q8.3@4300,1893.31 4381.69,1893.31 4426.75,1848.25 4463.08,1848.25 4475,1836.33 4475,1777.05 4527.05,1725 LIGHTING.3@4630.31,1725
TSAL_LV-: LIGHTING.2 Q13.3 | length 192.4
  Top w16: Q13.3@4475,1893.31 4508.31,1860 4530,1860 4586.26,1803.74 LIGHTING.2@4630.31,1803.74
pads on no net: AIR.P$3 AIR.P$4 CAN.P$3 CAN.P$4 CURRENT_SENSE_SUPPLY.P$3 CURRENT_SENSE_SUPPLY.P$4 ENABLE.P$3 ENABLE.P$4 FAULT_IN.P$3 FAULT_IN.P$4 FAULT_STAT.P$3 FAULT_STAT.P$4 HALL_SENSOR_INPUT.P$3 HALL_SENSOR_INPUT.P$4 LIGHTING.P$3 LIGHTING.P$4 POWER.P$3 POWER.P$4 POWER_ANALOG.P$3 POWER_ANALOG.P$4 SOFT_FAULT_STAT.P$3 SOFT_FAULT_STAT.P$4 THROTTLE_TC.P$3 THROTTLE_TC.P$4 U1.1 U1.3 U1.4 U1.5 U1.6 U1.25 U1.28 U1.29 U1.30 U1.38 U1.43 U1.46 U2.1 U2.3 U2.4 U2.5 U2.6 U2.18 U2.19 U2.21 U2.22 U2.25 U2.26 U2.27 U2.28 U2.29 U2.30 U2.31 U2.33 U2.38 U2.39 U2.40 U2.41 U2.45 U2.46 U$1.$P10 U$2.$P10 U$3.$P10 U$7.1 U$28.P6 U$28.P8 U$28.P9 U$28.P10 U$28.P11 U$28.P12 U$28.P13

## Polygon pours and split planes (outlines as drawn)
AGND on Top "Polygon_1_Net_AGND" (solid, remove dead copper, pour order 1): 2292,992 3083,992 3083,1303.31 3030.66,1355.66 3003.31,1383 2953.31,1383 2928.31,1408 2575,1408 2292,1408
GND on Top "Polygon_1_Net_GND" (solid, remove dead copper, pour order 3): 992,4608 992,992 2258,992 2258,1442 2275,1442 2925,1442 2971.69,1442 3117,1296.69 3117,992 4908,992 4908,4608
AGND on Bottom "Polygon_2_Net_AGND" (solid, remove dead copper, pour order 0): 2396.69,1408 2292,1303.31 2292,992 3083,992 3083,1303.31 3028.31,1358 2953.31,1358 2903.31,1408
GND on Bottom "Polygon_2_Net_GND" (solid, remove dead copper, pour order 2): 992,4608 992,992 2258,992 2258,1442 2971.69,1442 3117,1296.69 3117,992 4908,992 4908,4608 3600,4608

## Keep-outs
Keep-Out Layer:
  the board outline again, w0

## Silkscreen, mask and mechanical layers (free items; w line width, h text height)
Top Overlay:
  drawing of 1096 lines, arcs and shapes, not listed
  text "IMD" at 1231.99,3595.03 h32 r90
  text "BMS" at 1156.99,3589.69 h32 r90
  text "BSPD" at 1081.99,3557.7 h32 r90
  text "Andrew Smith" at 2455,2150 h32 r90
  text "Safety Board" at 2395,2145 h32 r90
  text "Illini Formula Electric" at 2340,1570 h50 r90
  text "Tractive System" at 2395,1570 h32 r90
  text "Apollo 2019 V1.1" at 2465,1570 h32 r90
Dimension:
  the board outline again, w0

## Dimensions
4900,4600 to 1000,4600 on Courtyard Bottom
1000,1000 to 1000,4600 on Courtyard Bottom